# EAGLE board siren (EAGLE 7.5.0)
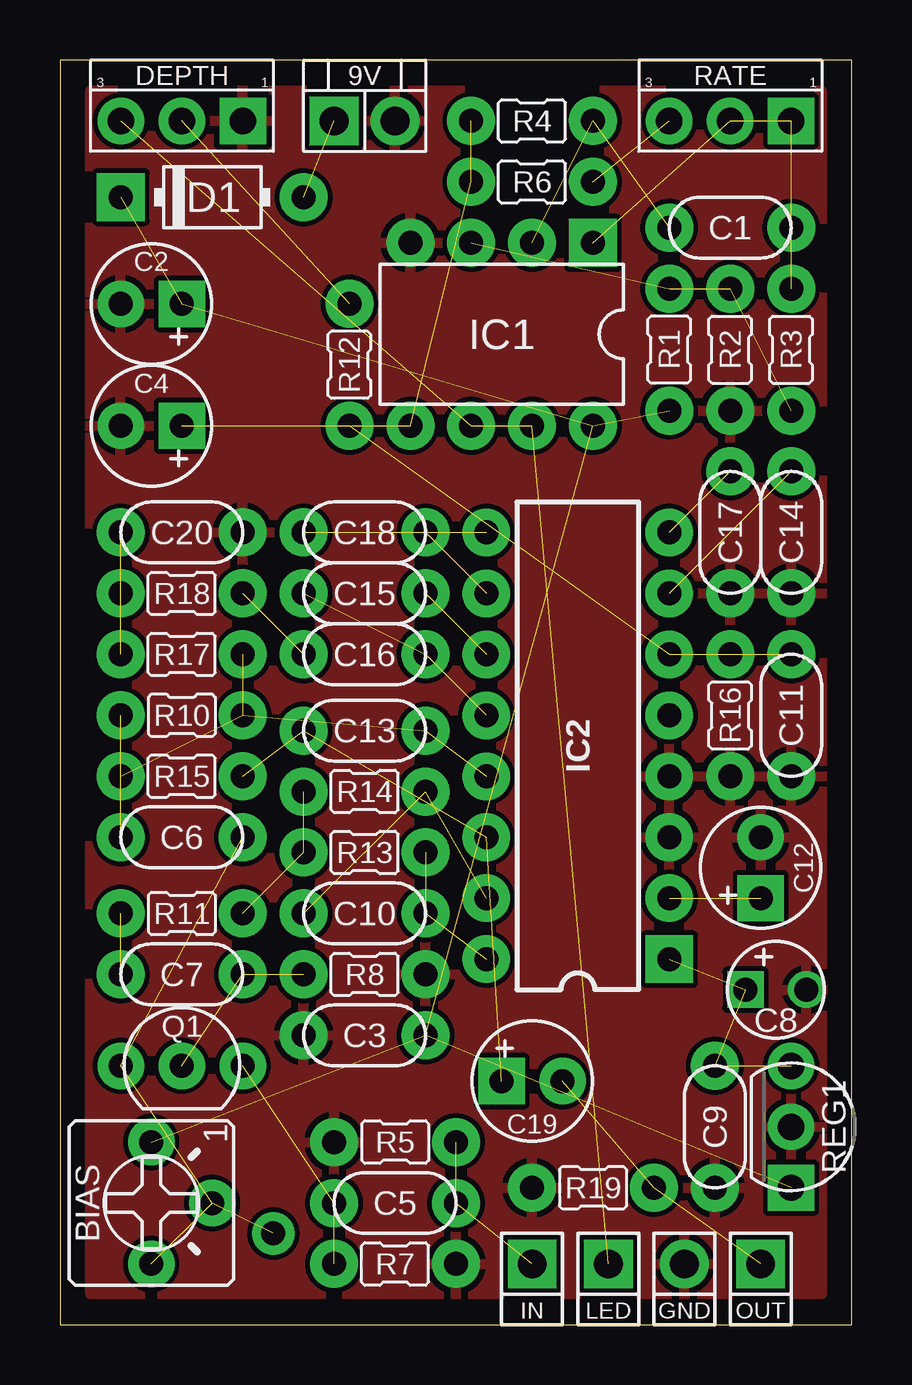
[diagram p0: board, top side]
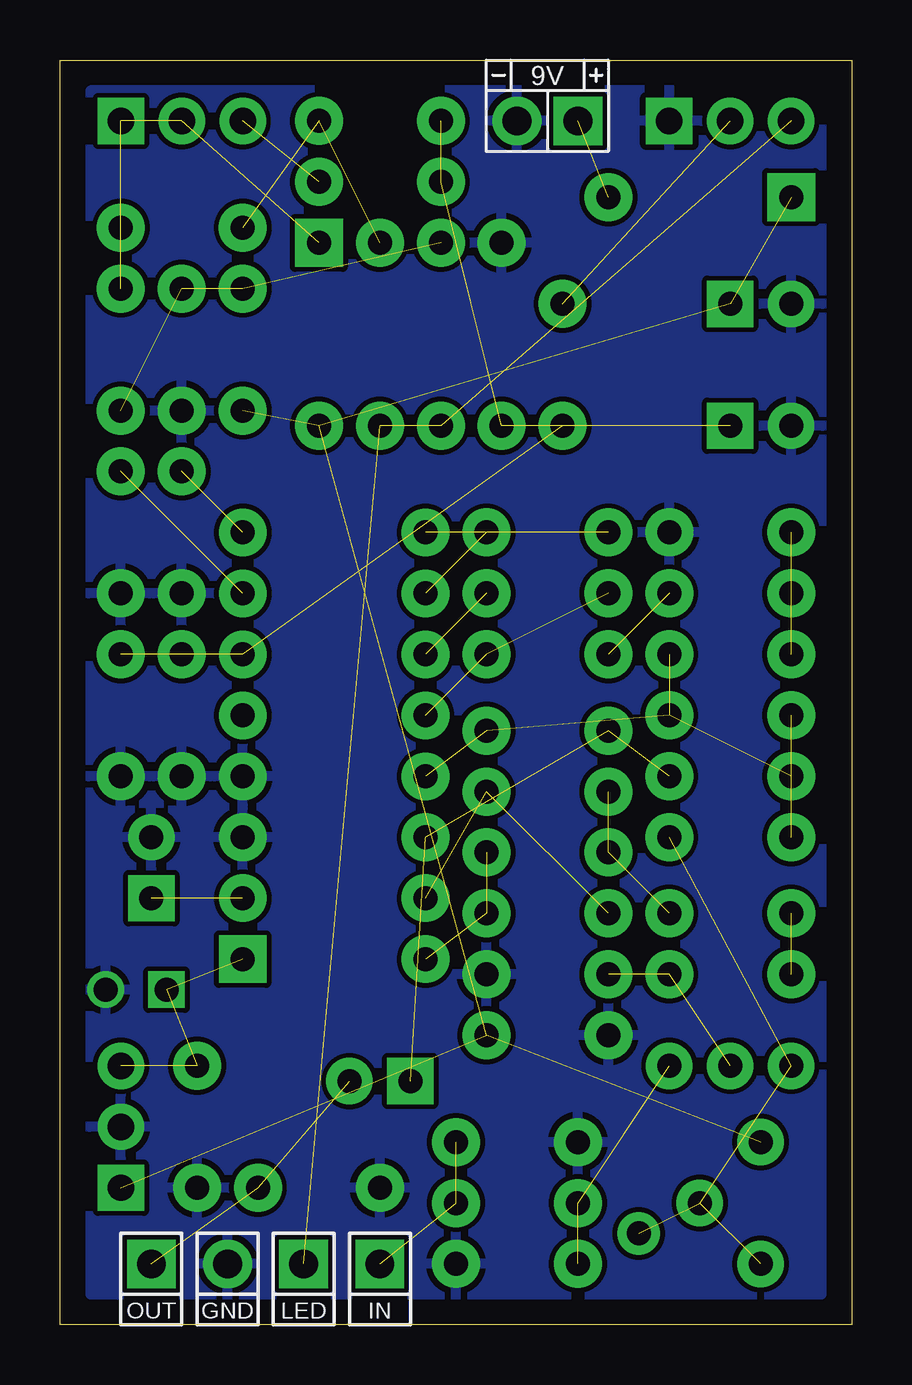
[diagram p1: board, bottom side, seen from below]

Size 33.02 x 52.7 mm. Coordinates in mm from the lower left corner, seen from the top.
Outline: 0,0 33.02,0 33.02,52.7 0,52.7 0,0
Copper layers (1*16): Top 0.035mm / dielectric 1.5mm / Bottom 0.035mm
Design rules "default": minimum track width 10mil, minimum drill 24mil, track to track 8mil, track to pad 8mil, pad to pad 8mil, via to via 8mil, smd to smd 8mil, copper to edge 40mil, drill to drill 8mil, minimum pad ring 10mil, minimum via ring 8mil, stop-mask expansion 4mil, vias tented up to drill 0mil, thermal gap 10mil

## Footprints (pad centres in the part's own frame; a part is rotated, then mirrored left to right if it is on the bottom)
DC = drill 1.2 pad 2.032: S -1.27,0 | drill 1.2 pad 2.032 square: T 1.27,0
2262_TRIM = drill 1 pad 1.93: 1 -2.54,0; 2 0,2.54; 3 2.54,0
050X030_025_2 = drill 1 pad 2: 1 -2.54,0; 2 2.54,0
050_020_1 = drill 1 pad 1.93 square: + -1.27,0 | drill 1 pad 1.93: - 1.27,0
050_020 = drill 1 pad 1.524 square: + -1.27,0 | drill 1 pad 1.524: - 1.27,0
DO41-3 = drill 1 pad 2: A 3.81,0 | drill 1 pad 2 square: C -3.81,0
PADS_SMALL = drill 1.1 pad 1.93 square: 1 2.54,0 | drill 1.1 pad 1.93: 2 0,0; 3 -2.54,0
ROUND = drill 1.2 pad 2.032: 1 0,0
DIL08 = drill 1 pad 2 square: 1 -3.81,-3.81 | drill 1 pad 2: 2 -1.27,-3.81; 3 1.27,-3.81; 4 3.81,-3.81; 5 3.81,3.81; 6 1.27,3.81; 7 -1.27,3.81; 8 -3.81,3.81
DIL16 = drill 1 pad 1.981 square: 1 -8.89,-3.81 | drill 1 pad 1.981: 2 -6.35,-3.81; 3 -3.81,-3.81; 4 -1.27,-3.81; 5 1.27,-3.81; 6 3.81,-3.81; 7 6.35,-3.81; 8 8.89,-3.81; 9 8.89,3.81; 10 6.35,3.81; 11 3.81,3.81; 12 1.27,3.81; 13 -1.27,3.81; 14 -3.81,3.81; 15 -6.35,3.81; 16 -8.89,3.81
SQUARE = drill 1.2 pad 2.032 square: 1 0,0
UNLABELED = drill 1 pad 1.778: P$1 0,0
TO92- = drill 1 pad 1.93: 1 2.54,0; 2 0,0; 3 -2.54,0
R0207/2V = drill 1 pad 2: 1 -2.54,0; 2 2.54,0
TO92-' = drill 1.1 pad 1.93 square: 1 -2.54,0 | drill 1.1 pad 1.93: 2 0,0; 3 2.54,0

## Placement (x,y rotation side)
9V  DC_MONO  [DC]  12.7,50.16 0 bottom
BIAS  50k  [2262_TRIM]  3.81,5.08 270 top
C1  10n  [050X030_025_2]  27.94,45.72 180 top
C2  47u  [050_020_1]  3.81,42.55 180 top
C3  100n  [050X030_025_2]  12.7,12.06 180 top
C4  10u  [050_020_1]  3.81,37.47 180 top
C5  10n  [050X030_025_2]  13.97,5.08 0 top
C6  22n  [050X030_025_2]  5.08,20.32 0 top
C7  220n  [050X030_025_2]  5.08,14.61 0 top
C8  10u  [050_020]  29.84,13.97 0 top
C9  100n  [050X030_025_2]  27.3,8.26 270 top
C10  2n2  [050X030_025_2]  12.7,17.14 0 top
C11  10n  [050X030_025_2]  30.48,25.4 270 top
C12  10u  [050_020_1]  29.21,19.05 90 top
C13  100p  [050X030_025_2]  12.7,24.77 180 top
C14  100n  [050X030_025_2]  30.48,33.02 270 top
C15  100n  [050X030_025_2]  12.7,30.48 180 top
C16  220n  [050X030_025_2]  12.7,27.94 0 top
C17  100n  [050X030_025_2]  27.94,33.02 270 top
C18  100n  [050X030_025_2]  12.7,33.02 0 top
C19  4u7  [050_020_1]  19.68,10.16 0 top
C20  10n  [050X030_025_2]  5.08,33.02 180 top
D1  1N4817  [DO41-3]  6.35,46.99 0 top
DEPTH  10kB  [PADS_SMALL]  5.08,50.16 0 top
GND  PADRND  [ROUND]  26.04,2.54 0 top
IC1  NE5532  [DIL08]  18.41,41.27 180 top
IC2  [DIL16]  21.59,24.13 90 top
IN  PADSQR  [SQUARE]  19.68,2.54 0 top
LED  PADSQR  [SQUARE]  22.86,2.54 0 top
OUT  PADSQR  [SQUARE]  29.21,2.54 0 top
PAD2  PAD  [UNLABELED]  8.89,3.81 0 top
Q1  2N5457  [TO92-]  5.08,10.79 0 top
R1  100k  [R0207/2V]  25.4,40.64 270 top
R2  100k  [R0207/2V]  27.94,40.64 90 top
R3  220k  [R0207/2V]  30.48,40.64 90 top
R4  220k  [R0207/2V]  19.68,50.16 180 top
R5  1M  [R0207/2V]  13.97,7.62 0 top
R6  15k  [R0207/2V]  19.68,47.62 180 top
R7  1M  [R0207/2V]  13.97,2.54 180 top
R8  10k  [R0207/2V]  12.7,14.61 180 top
R10  18k  [R0207/2V]  5.08,25.4 0 top
R11  10k  [R0207/2V]  5.08,17.14 0 top
R12  18k  [R0207/2V]  12.06,40.01 270 top
R13  10k  [R0207/2V]  12.7,19.68 180 top
R14  18k  [R0207/2V]  12.7,22.23 180 top
R15  10k  [R0207/2V]  5.08,22.86 180 top
R16  2k  [R0207/2V]  27.94,25.4 90 top
R17  12k  [R0207/2V]  5.08,27.94 180 top
R18  4k7  [R0207/2V]  5.08,30.48 180 top
R19  10k  [R0207/2V]  22.23,5.71 0 top
RATE  100kC  [PADS_SMALL]  27.94,50.16 0 top
REG1  LM78L05  [TO92-']  30.48,8.26 90 top

## Library data of the parts
9V = jacks
BIAS DEPTH RATE = potentiometers
C1 C3 C5-C7 C9-C11 C13-C18 C20 = capacitors-film
C2 C4 C8 C12 C19 = capacitors-elec
D1 = diodes
GND IN LED OUT PAD2 = supply pins
IC1 IC2 = integrated circuits
Q1 = transistors
R1-R8 R10-R19 = resistors
REG1 = regulators

## Nets
+9V: 9V.T D1.A
GND: 9V.S C2.- C3.2 C4.- C8.- C9.2 C11.2 C12.- C14.2 C17.2 C20.1 DEPTH.1 GND.1 IC1.4 IC2.3 IC2.4 R2.1 R5.1 R7.1 R8.1 R16.1 R19.1 REG1.2
IN: C5.2 IN.1 R5.2
LED: DEPTH.3 IC1.6 IC1.7 LED.1
N$3: C8.+ C9.1 IC2.1 REG1.3
N$4: C10.2 IC2.16 R13.1
N$5: C10.1 IC2.15 R14.1
N$6: C20.2 R17.2 R18.2
N$7: C12.+ IC2.2
N$8: C14.1 IC2.7
N$9: C17.1 IC2.8
N$10: C15.1 IC2.11
N$11: C18.2 IC2.10
N$12: C18.1 IC2.9
N$13: C13.2 C19.+ IC2.14 R15.1
N$14: C13.1 IC2.13 R10.2 R15.2 R17.1
N$15: R11.2 R13.2 R14.2
N$16: C7.1 R11.1
N$17: C7.2 Q1.2 R8.2
N$18: C6.1 R10.1
N$19: BIAS.2 BIAS.3 C6.2 PAD2.P$1 Q1.3
N$20: C5.1 Q1.1 R7.2
N$21: IC1.3 R1.1 R2.2 R3.1
N$22: C15.2 C16.2 IC2.12
N$23: C16.1 R18.1
N$24: C1.1 IC1.1 R3.2 RATE.1 RATE.2
N$25: C1.2 IC1.2 R4.1
N$26: DEPTH.2 R12.1
N$27: R6.1 RATE.3
N$28: C4.+ IC1.5 R4.2 R6.2
N$31: C11.1 IC2.6 R12.2 R16.2
OUT: C19.- OUT.1 R19.2
VC: BIAS.1 C2.+ C3.1 D1.C IC1.8 R1.2 REG1.1

## Tracks (layer width: path | path; a pad name or v marks a point on that pad's centre or on a via)
+9V  (1 unrouted)
GND
  pour Top: 1.27,51.44 31.75,51.44 31.75,1.27 1.27,1.27
  pour Bottom: 1.27,51.44 31.75,51.44 31.75,1.27 1.27,1.27
IN  (2 unrouted)
LED  (3 unrouted)
N$3  (3 unrouted)
N$4  (2 unrouted)
N$5  (2 unrouted)
N$6  (2 unrouted)
N$7  (1 unrouted)
N$8  (1 unrouted)
N$9  (1 unrouted)
N$10  (1 unrouted)
N$11  (1 unrouted)
N$12  (1 unrouted)
N$13  (3 unrouted)
N$14  (4 unrouted)
N$15  (2 unrouted)
N$16  (1 unrouted)
N$17  (2 unrouted)
N$18  (1 unrouted)
N$19  (4 unrouted)
N$20  (2 unrouted)
N$21  (3 unrouted)
N$22  (2 unrouted)
N$23  (1 unrouted)
N$24  (4 unrouted)
N$25  (2 unrouted)
N$26  (1 unrouted)
N$27  (1 unrouted)
N$28  (3 unrouted)
N$31  (3 unrouted)
OUT  (2 unrouted)
VC  (6 unrouted)